# EAGLE board WAGband_2_plus_chains (EAGLE 7.5.0)
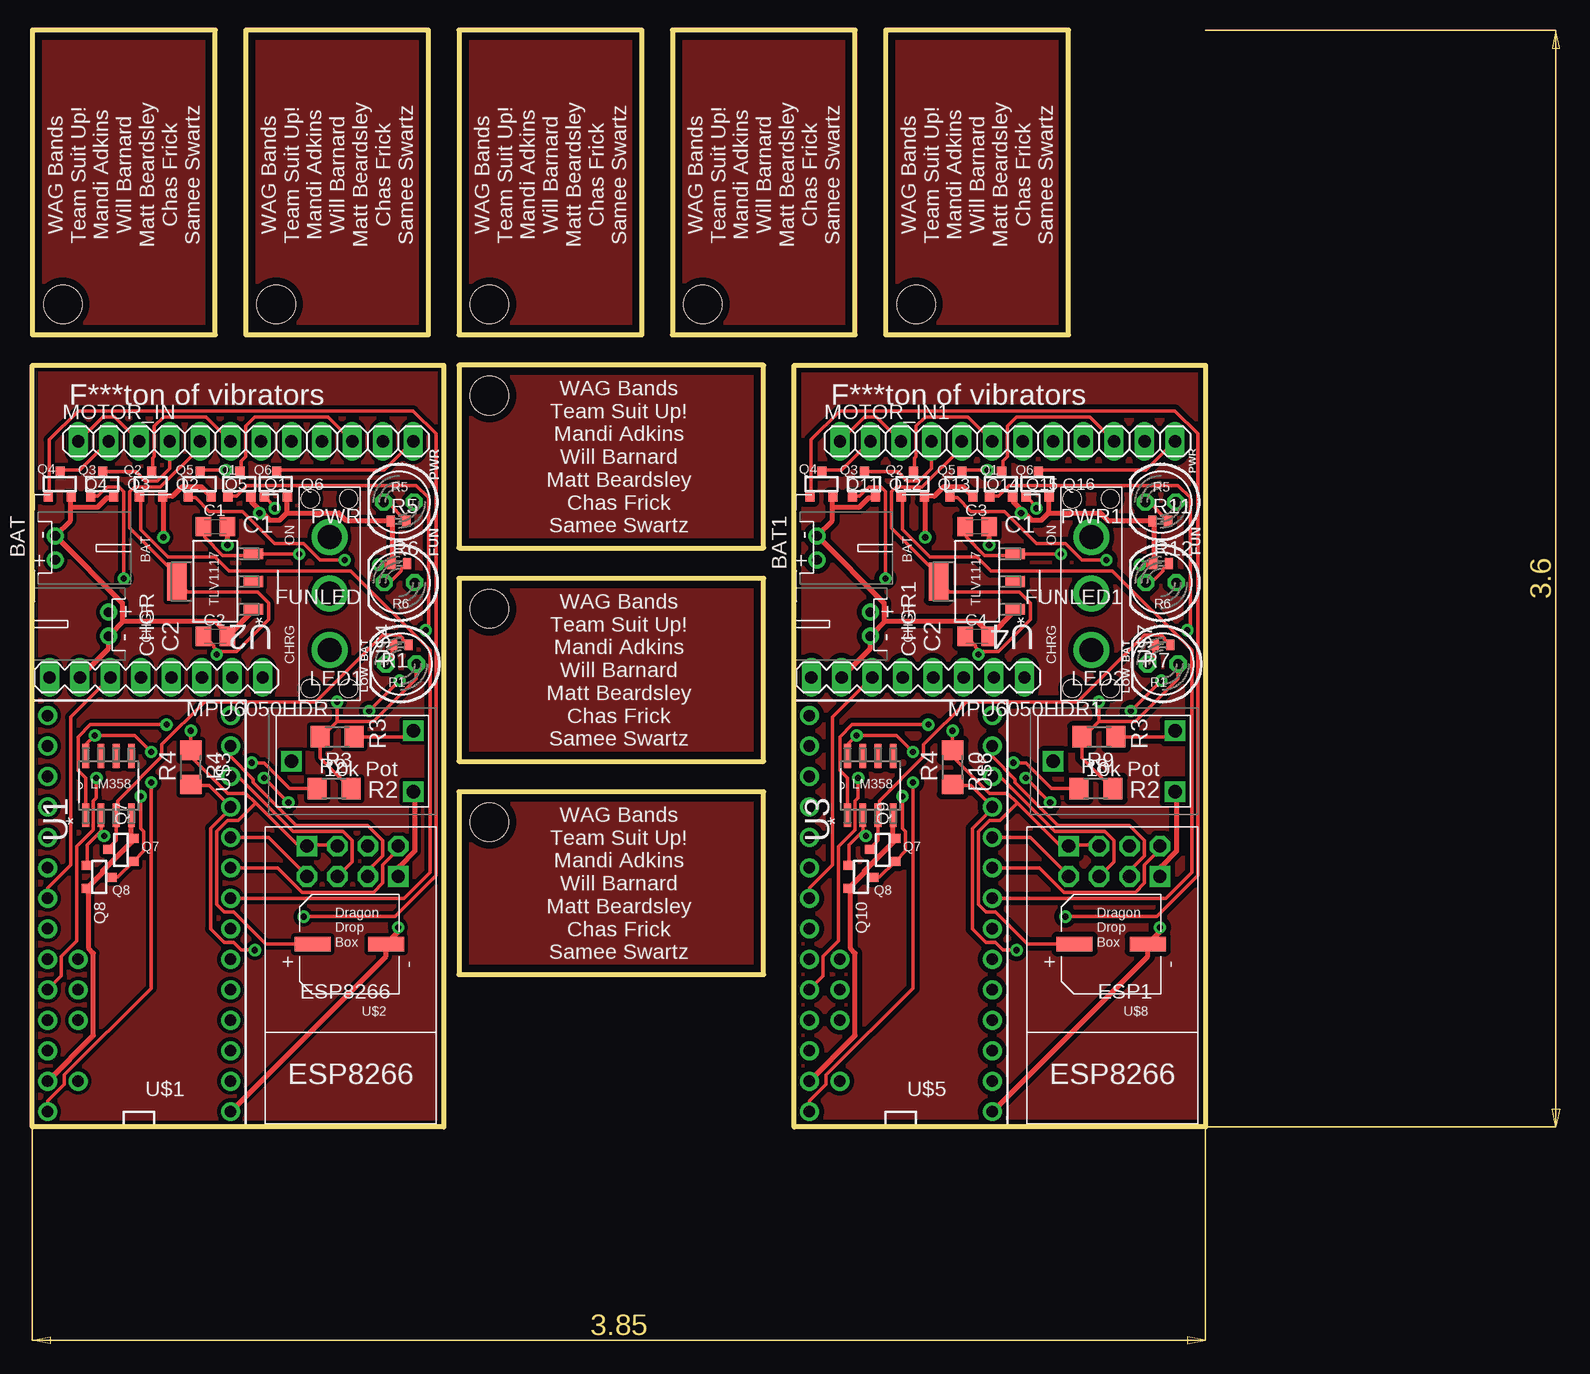
[diagram p0: board, top side]
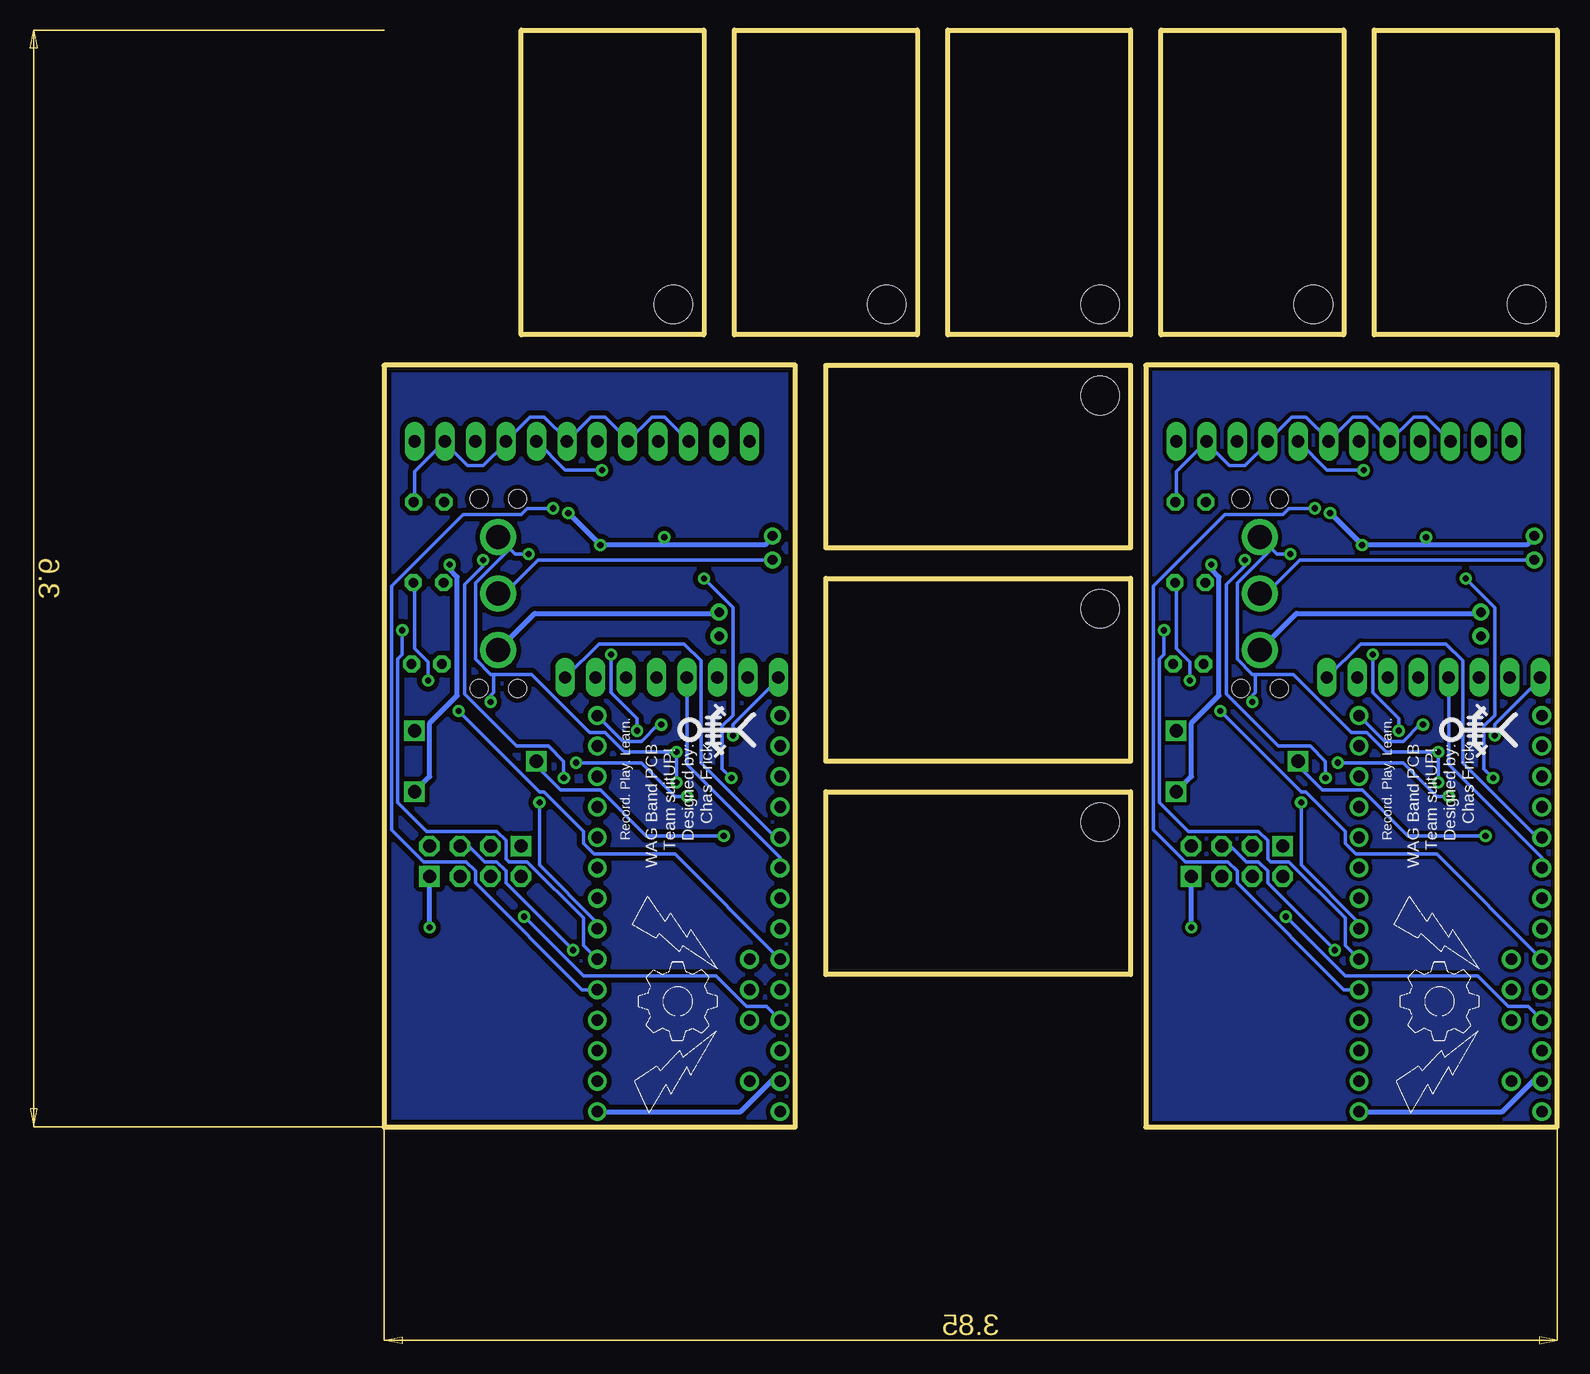
[diagram p1: board, bottom side, seen from below]

Size 97.79 x 91.44 mm. Coordinates in mm from the lower left corner, seen from the top.
Outline: 0,0 0,63.5 34.29,63.5 34.29,0 0,0
Outline: 63.5,0 63.5,63.5 97.79,63.5 97.79,0 63.5,0
Outline: 0,66.04 15.24,66.04 15.24,91.44 0,91.44 0,66.04
Outline: 17.78,66.04 33.02,66.04 33.02,91.44 17.78,91.44 17.78,66.04
Outline: 35.56,66.04 50.8,66.04 50.8,91.44 35.56,91.44 35.56,66.04
Outline: 53.34,66.04 68.58,66.04 68.58,91.44 53.34,91.44 53.34,66.04
Outline: 71.12,66.04 86.36,66.04 86.36,91.44 71.12,91.44 71.12,66.04
Outline: 35.56,63.5 35.56,48.26 60.96,48.26 60.96,63.5 35.56,63.5
Outline: 35.56,45.72 35.56,30.48 60.96,30.48 60.96,45.72 35.56,45.72
Outline: 35.56,27.94 35.56,12.7 60.96,12.7 60.96,27.94 35.56,27.94
Copper layers (1*16): Top 0.035mm / dielectric 1.5mm / Bottom 0.035mm
Design rules "SparkFun": minimum track width 8mil, minimum drill 20mil, track to track 8mil, track to pad 8mil, pad to pad 8mil, via to via 8mil, smd to smd 8mil, copper to edge 8mil, drill to drill 8mil, minimum pad ring 12mil, minimum via ring 10mil, stop-mask expansion 4mil, vias tented up to drill 20mil, thermal gap 10mil
Net classes: 0 default: width 0.305 mm; 1 GND: width 0.406 mm; 2 VCC: width 0.406 mm
Holes 3.2 mm at 2.54,68.58 20.32,68.58 38.1,68.58 55.88,68.58 73.66,68.58 38.1,60.96 38.1,43.18 38.1,25.4

## Footprints (pad centres in the part's own frame; a part is rotated, then mirrored left to right if it is on the bottom)
JST-PH-2-THM-RA = drill 0.8 pad 1.422: 1 1,0; 2 -1,0
C0805K = smd 1.3 x 1.6: 1 -1,0; 2 1,0
ESP01 = drill 1.1 octagon: CH_PD -1.285,-8.178; GPIO0 1.255,-5.638; GPIO2 -1.285,-5.638; RST 1.255,-8.178; RX 3.795,-5.638; TX -3.825,-8.178 | drill 1.1 square: GND -3.825,-5.638; VCC 3.795,-8.178
LED5MM = drill 0.813 octagon: A -1.27,0; K 1.27,0
1X12 = drill 1.016 long: 1 -13.97,0; 2 -11.43,0; 3 -8.89,0; 4 -6.35,0; 5 -3.81,0; 6 -1.27,0; 7 1.27,0; 8 3.81,0; 9 6.35,0; 10 8.89,0; 11 11.43,0; 12 13.97,0
MPU6050 = drill 1.016 long: ADD 6.35,0; GND -6.35,0; INT 8.89,0; SCL -3.81,0; SDA -1.27,0; VCC -8.89,0; XCL 3.81,0; XDA 1.27,0
SOT-23 = smd 0.762 x 0.762: 1 -0.979,-1.101; 2 0.94,-1.101; 3 0.025,1.067
R0402 = smd 0.7 x 0.9: 1 -0.65,0; 2 0.65,0
R1206 = smd 1.6 x 1.803: 1 -1.422,0; 2 1.422,0
SOIC127P600X175-8N = smd 1.981 x 0.559: 1 -2.464,1.905; 2 -2.464,0.635; 3 -2.464,-0.635; 4 -2.464,-1.905; 5 2.464,-1.905; 6 2.464,-0.635; 7 2.464,0.635; 8 2.464,1.905
SOT230P700X180-4N = smd 1.626 x 0.889: 1 -3.2,2.311; 2 -3.2,0; 3 -3.2,-2.311 | smd 1.626 x 3.175: 4 3.2,0
TEENSY3-DIL+4 = drill 0.965: 0 -7.62,13.97; 1 -7.62,11.43; 2 -7.62,8.89; 3 -7.62,6.35; 3.3V 7.62,11.43; 4 -7.62,3.81; 5 -7.62,1.27; 6 -7.62,-1.27; 7 -7.62,-3.81; 8 -7.62,-6.35; 9 -7.62,-8.89; 10 -7.62,-11.43; 11 -7.62,-13.97; 12 -7.62,-16.51; 13 7.62,-16.51; 14/A0 7.62,-13.97; 15/A1 7.62,-11.43; 16/A2 7.62,-8.89; 17/A3 7.62,-6.35; 18/A4 7.62,-3.81; 19/A5 7.62,-1.27; 20/A6 7.62,1.27; 21/A7 7.62,3.81; 22/A8 7.62,6.35; 23/A9 7.62,8.89; A10 5.08,6.35; A11 5.08,3.81; AGND 7.62,13.97; AREF 5.08,8.89; GND -7.62,16.51; VIN 7.62,16.51; VUSB 5.08,13.97
TZV1000M = smd 1.2 x 3: + 0,3.05; - 0,-3.05
CB10 = drill 1.1 square: P$1 -2.54,-5.08; P$2 2.54,-5.08; P$3 0,5.08
SPDT = drill 2: P$1 0,-4.699; P$2 0,0; P$3 0,4.699 | hole 1.5: 1.6,7.899; -1.6,-7.899; 1.6,-7.899; -1.6,7.899

## Placement (x,y rotation side)
BAT  [JST-PH-2-THM-RA]  1.91,48.26 270 top
BAT1  [JST-PH-2-THM-RA]  65.41,48.26 270 top
C1  105  [C0805K]  15.24,50.04 0 top
C2  105  [C0805K]  15.24,40.89 0 top
C3  105  [C0805K]  78.74,50.04 0 top
C4  105  [C0805K]  78.74,40.89 0 top
CHGR  [JST-PH-2-THM-RA]  6.35,41.91 90 top
CHGR1  [JST-PH-2-THM-RA]  69.85,41.91 90 top
ESP1  ESP01  [ESP01]  90.17,15.24 180 top
ESP8266  ESP01  [ESP01]  26.67,15.24 180 top
FUNLED  [LED5MM]  30.58,45.36 180 top
FUNLED1  [LED5MM]  94.08,45.36 180 top
LED1  [LED5MM]  30.73,38.58 180 top
LED2  [LED5MM]  94.23,38.58 180 top
MOTOR_IN  [1X12]  17.78,57.15 0 top
MOTOR_IN1  [1X12]  81.28,57.15 0 top
MPU6050HDR  [MPU6050]  10.31,37.47 0 top
MPU6050HDR1  [MPU6050]  73.81,37.47 0 top
PWR  [LED5MM]  30.56,52.1 180 top
PWR1  [LED5MM]  94.06,52.1 180 top
Q1  [SOT-23]  17.27,53.59 0 top
Q2  [SOT-23]  9.91,53.59 0 top
Q3  [SOT-23]  5.84,53.59 0 top
Q4  [SOT-23]  2.29,53.59 0 top
Q5  [SOT-23]  13.97,53.59 0 top
Q6  [SOT-23]  20.32,53.59 0 top
Q7  [SOT-23]  7.37,23.11 90 top
Q8  [SOT-23]  5.59,20.83 270 top
Q9  [SOT-23]  70.87,23.11 90 top
Q10  [SOT-23]  69.09,20.83 270 top
Q11  [SOT-23]  65.79,53.59 0 top
Q12  [SOT-23]  69.34,53.59 0 top
Q13  [SOT-23]  73.41,53.59 0 top
Q14  [SOT-23]  77.47,53.59 0 top
Q15  [SOT-23]  80.77,53.59 0 top
Q16  [SOT-23]  83.82,53.59 0 top
R1  1k  [R0402]  30.71,40.18 180 top
R2  30k  [R1206]  25.15,28.19 0 top
R3  30k  [R1206]  25.4,32.51 180 top
R4  10k  [R1206]  13.21,29.97 270 top
R5  1k  [R0402]  30.51,50.5 0 top
R6  1k  [R0402]  30.58,46.96 0 top
R7  1k  [R0402]  94.21,40.18 180 top
R8  30k  [R1206]  88.65,28.19 0 top
R9  30k  [R1206]  88.9,32.51 180 top
R10  10k  [R1206]  76.71,29.97 270 top
R11  1k  [R0402]  94.01,50.5 0 top
R12  1k  [R0402]  94.08,46.96 0 top
U1  LM358DR  [SOIC127P600X175-8N]  6.35,28.45 90 top
U2  TLV1117-33CDCY  [SOT230P700X180-4N]  15.24,45.47 180 top
U3  LM358DR  [SOIC127P600X175-8N]  69.85,28.45 90 top
U4  TLV1117-33CDCY  [SOT230P700X180-4N]  78.74,45.47 180 top
U$1  TEENSY_3.1_DIL+4  [TEENSY3-DIL+4]  8.89,17.78 180 top
U$2  TZVCAP  [TZV1000M]  26.42,15.24 90 top
U$3  CB10LV103M  [CB10]  26.67,30.48 90 top
U$4  MS12ASW13  [SPDT]  24.77,44.45 0 top
U$5  TEENSY_3.1_DIL+4  [TEENSY3-DIL+4]  72.39,17.78 180 top
U$6  CB10LV103M  [CB10]  90.17,30.48 90 top
U$7  MS12ASW13  [SPDT]  88.27,44.45 0 top
U$8  TZVCAP  [TZV1000M]  89.92,15.24 90 top

## Library data of the parts
BAT BAT1 CHGR CHGR1 = adafruit
C1-C4 R1-R12 = resistor
ESP1 ESP8266 MPU6050HDR MPU6050HDR1 Q1-Q16 U$2-U$4 U$6-U$8 = mqp_custom_parts
FUNLED FUNLED1 LED1 LED2 PWR PWR1 = led
MOTOR_IN MOTOR_IN1 = pinhead
U1 U3 = Texas Instruments_By_element14_Batch_1; MPN: LM358DR; OC_FARNELL: 1831865; OC_NEWARK: 34K7599; PACKAGE: SOIC-8; SUPPLIER: Texas Instruments
U2 U4 = Texas Instruments_By_element14_Batch_1; MPN: TLV1117-33CDCY; OC_FARNELL: 1494942; OC_NEWARK: 67K8520; PACKAGE: SOT-223-3; SUPPLIER: TEXAS INSTRUMENTS
U$1 U$5 = Teensy_3_and_LC_Series_Boards_v1.1

## Nets
3.3V: U$1.3.3V
3.3V1: U$5.3.3V
AREF: U$1.AREF
AREF1: U$5.AREF
ESP8266_!RST: ESP8266.CH_PD R4.2 U$1.9
ESP8266_!RST1: ESP1.CH_PD R10.2 U$5.9
ESP8266_RX: ESP8266.RX U$1.8
ESP8266_RX1: ESP1.RX U$5.8
ESP8266_TX: ESP8266.TX U$1.7
ESP8266_TX1: ESP1.TX U$5.7
GND [GND]: BAT.2 C1.2 C2.2 CHGR.2 ESP8266.GND MPU6050HDR.GND Q1.2 Q2.2 Q3.2 Q4.2 Q5.2 Q6.2 Q7.2 Q8.2 R5.1 R6.1 U1.4 U2.1 U$1.AGND U$1.GND U$2.- U$3.P$1
GND1 [GND]: BAT1.2 C3.2 C4.2 CHGR1.2 ESP1.GND MPU6050HDR1.GND Q9.2 Q10.2 Q11.2 Q12.2 Q13.2 Q14.2 Q15.2 Q16.2 R11.1 R12.1 U3.4 U4.1 U$5.AGND U$5.GND U$6.P$1 U$8.-
GPIO0: ESP8266.GPIO0 U$1.10
GPIO1: ESP1.GPIO2 U$5.11
GPIO2: ESP8266.GPIO2 U$1.11
GPIO3: ESP1.GPIO0 U$5.10
LED_REF: Q7.3 R1.1 U1.3
LED_REF1: Q9.3 R7.1 U3.3
LOW_BATT_DIO: U1.1 U$1.12
LOW_BATT_DIO1: U3.1 U$5.12
M1: Q1.1 U$1.4
M2: Q2.1 U$1.6
M3: Q3.1 U$1.22/A8
M4: Q4.1 U$1.23/A9
M5: Q5.1 U$1.5
M6: Q6.1 U$1.3
M7: Q13.1 U$5.6
M8: Q14.1 U$5.5
M9: Q15.1 U$5.4
M10: Q16.1 U$5.3
M11: Q12.1 U$5.22/A8
M12: Q11.1 U$5.23/A9
N$1: MPU6050HDR.INT U$1.17/A3
N$2: MPU6050HDR.SDA U$1.18/A4
N$3: FUNLED.A U$1.21/A7
N$4: FUNLED.K R6.2
N$7: MOTOR_IN1.12 Q16.3
N$8: MOTOR_IN1.10 Q15.3
N$9: MOTOR_IN.12 Q6.3
N$10: MOTOR_IN.10 Q1.3
N$11: MOTOR_IN.8 Q5.3
N$12: MOTOR_IN1.8 Q14.3
N$13: MOTOR_IN.6 Q2.3
N$14: MOTOR_IN.2 Q4.3
N$15: MOTOR_IN.4 Q3.3
N$16: MOTOR_IN1.6 Q13.3
N$17: MPU6050HDR.SCL U$1.19/A5
N$18: MOTOR_IN1.2 Q11.3
N$19: MOTOR_IN1.4 Q12.3
N$20: MPU6050HDR1.SCL U$5.19/A5
N$21: PWR.K R5.2
N$22: LED1.K R1.2
N$23: Q7.1 Q8.3 R2.1
N$24: PWR1.K R11.2
N$25: LED2.K R7.2
N$26: Q9.1 Q10.3 R8.1
N$27: R3.1 U$3.P$2
N$28: BAT.1 U$4.P$2
N$29 [VCC]: CHGR.1 U$4.P$1
N$30: R9.1 U$6.P$2
N$31: BAT1.1 U$7.P$2
N$32 [VCC]: CHGR1.1 U$7.P$1
N$33: MPU6050HDR1.INT U$5.17/A3
N$34: MPU6050HDR1.SDA U$5.18/A4
N$35: FUNLED1.K R12.2
N$36: FUNLED1.A U$5.21/A7
POT_REF: Q8.1 U1.2 U$3.P$3
POT_REF1: Q10.1 U3.2 U$6.P$3
VCC: C2.1 ESP8266.RST ESP8266.VCC MOTOR_IN.1 MOTOR_IN.3 MOTOR_IN.5 MOTOR_IN.7 MOTOR_IN.9 MOTOR_IN.11 PWR.A R4.1 U2.4 U$2.+
VCC1: C4.1 ESP1.RST ESP1.VCC MOTOR_IN1.1 MOTOR_IN1.3 MOTOR_IN1.5 MOTOR_IN1.7 MOTOR_IN1.9 MOTOR_IN1.11 PWR1.A R10.1 U4.4 U$8.+
VDD: C1.1 LED1.A MPU6050HDR.VCC R2.2 R3.2 U1.8 U2.3 U$1.VIN U$4.P$3
VDD1: C3.1 LED2.A MPU6050HDR1.VCC R8.2 R9.2 U3.8 U4.3 U$5.VIN U$7.P$3
VUSB: U$1.VUSB
VUSB1: U$5.VUSB

## Tracks (layer width: path | path; a pad name or v marks a point on that pad's centre or on a via)
ESP8266_!RST  (via drill 0.51)
  Top 0.305: R4.2 13.21,28.45 14.73,28.45 U$1.9 16.51,26.54 14.86,24.89 14.86,16.51 16,15.37 16.76,15.37 17.4,14.73 v18.54,14.73
  Bottom 0.305: v18.54,14.73 24.13,20.32 24.13,21.34 24.89,22.1 25.91,22.1 27.18,23.37 27.94,23.37 ESP8266.CH_PD
ESP8266_!RST1  (via drill 0.51)
  Top 0.305: R10.2 76.71,28.45 78.23,28.45 U$5.9 80.01,26.54 78.36,24.89 78.36,16.51 79.5,15.37 80.26,15.37 80.9,14.73 v82.04,14.73
  Bottom 0.305: v82.04,14.73 87.63,20.32 87.63,21.34 88.39,22.1 89.41,22.1 90.68,23.37 91.44,23.37 ESP1.CH_PD
ESP8266_RX
  Top 0.305: U$1.8 19.68,24.13 22.86,20.95 ESP8266.RX
ESP8266_RX1
  Top 0.305: U$5.8 83.19,24.13 86.36,20.95 ESP1.RX
ESP8266_TX
  Top 0.305: U$1.7 20.45,21.59 22.48,19.56 28.45,19.56 29.21,20.32 29.21,21.84 30.48,23.11 30.48,23.37 ESP8266.TX
ESP8266_TX1
  Top 0.305: U$5.7 83.95,21.59 85.98,19.56 91.95,19.56 92.71,20.32 92.71,21.84 93.98,23.11 93.98,23.37 ESP1.TX
GND  (via drill 0.51)
  Top 0.406: U2.1 18.41,43.05 16.26,40.89 C2.2 16.26,41.15 15.24,42.16 7.62,42.16 | MPU6050HDR.GND 3.94,37.47 6.35,39.88 CHGR.2 6.48,41.02 7.62,42.16 | 19.05,51.31 19.81,50.55 20.57,50.55 21.21,51.18 | 19.05,51.31 18.29,52.07 18.29,52.45 Q1.2 | 21.21,51.18 21.21,52.45 Q6.2 | 21.21,51.18 25.53,51.18 26.16,50.55 29.72,50.55 R5.1 29.97,50.42 29.97,46.99 R6.1 29.84,46.86 v28.83,46.86 | Q5.2 14.86,52.58 14.1,53.34 12.45,53.34 11.68,52.58 10.92,52.58 Q2.2 10.92,52.32 v10.92,49.15 | 3.17,51.69 3.17,50.55 1.91,49.28 BAT.2 2.03,49.15 7.49,43.69 7.49,42.29 7.62,42.16 | 3.17,51.69 3.17,52.45 Q4.2 | 3.17,51.69 5.46,51.69 6.22,52.45 6.73,52.45 Q3.2 | v16.26,48.51 16.26,50.04 C1.2 | v18.92,51.18 19.05,51.31 | U$3.P$1 31.88,27.81 31.88,22.99 30.61,21.72 30.61,20.95 ESP8266.GND | U1.4 8.26,24 Q7.2 8.51,24 5.84,21.34 5.84,21.21 4.57,19.94 Q8.2 4.7,19.81 4.7,14.86 5.08,14.48 5.08,7.62 U$1.AGND | U$1.GND 29.46,14.22 U$2.- 29.59,15.37 30.48,16.26 v30.48,16.64
  Bottom 0.406: 10.92,48.51 2.54,48.51 1.91,49.15 BAT.2 | 10.92,48.51 v16.26,48.51 v18.92,51.18 | 10.92,48.51 v10.92,49.15 | U$1.AGND 2.03,3.81 4.57,1.27 U$1.GND | v30.48,16.64 30.48,20.83 ESP8266.GND | v28.83,46.86 28.83,46.48 28.19,45.85 28.19,35.94 30.48,33.66 30.48,29.21 U$3.P$1
GND1  (via drill 0.51)
  Top 0.406: U4.1 81.92,43.05 79.76,40.89 C4.2 79.76,41.15 78.74,42.16 71.12,42.16 | MPU6050HDR1.GND 67.44,37.47 69.85,39.88 CHGR1.2 69.98,41.02 71.12,42.16 | 82.55,51.31 83.31,50.55 84.07,50.55 84.71,51.18 | 82.55,51.31 81.79,52.07 81.79,52.45 Q15.2 | 84.71,51.18 84.71,52.45 Q16.2 | 84.71,51.18 89.03,51.18 89.66,50.55 93.22,50.55 R11.1 93.47,50.42 93.47,46.99 R12.1 93.34,46.86 v92.33,46.86 | Q14.2 78.36,52.58 77.6,53.34 75.95,53.34 75.18,52.58 74.42,52.58 Q13.2 74.42,52.32 v74.42,49.15 | 66.67,51.69 66.67,50.55 65.41,49.28 BAT1.2 65.53,49.15 70.99,43.69 70.99,42.29 71.12,42.16 | 66.67,51.69 66.67,52.45 Q11.2 | 66.67,51.69 68.96,51.69 69.72,52.45 70.23,52.45 Q12.2 | v79.76,48.51 79.76,50.04 C3.2 | v82.42,51.18 82.55,51.31 | U$6.P$1 95.38,27.81 95.38,22.99 94.11,21.72 94.11,20.95 ESP1.GND | U3.4 71.75,24 Q9.2 72.01,24 69.34,21.34 69.34,21.21 68.07,19.94 Q10.2 68.2,19.81 68.2,14.86 68.58,14.48 68.58,7.62 U$5.AGND | U$5.GND 92.96,14.22 U$8.- 93.09,15.37 93.98,16.26 v93.98,16.64
  Bottom 0.406: 74.42,48.51 66.04,48.51 65.41,49.15 BAT1.2 | 74.42,48.51 v79.76,48.51 v82.42,51.18 | 74.42,48.51 v74.42,49.15 | U$5.AGND 65.53,3.81 68.07,1.27 U$5.GND | v93.98,16.64 93.98,20.83 ESP1.GND | v92.33,46.86 92.33,46.48 91.69,45.85 91.69,35.94 93.98,33.66 93.98,29.21 U$6.P$1
GPIO0
  Top 0.305: U$1.10 17.14,29.21 21.72,24.64 25.91,24.64 26.67,23.88 26.67,22.1 25.53,20.95 ESP8266.GPIO0
GPIO1
  Top 0.305: U$5.11 80.01,30.86 81.92,28.96 81.92,28.7 85.47,25.15 91.44,25.15 92.71,23.88 92.71,22.61 91.57,21.46 91.57,20.95 ESP1.GPIO2
GPIO2
  Top 0.305: U$1.11 16.51,30.86 18.41,28.96 18.41,28.7 21.97,25.15 27.94,25.15 29.21,23.88 29.21,22.61 28.07,21.46 28.07,20.95 ESP8266.GPIO2
GPIO3
  Top 0.305: U$5.10 80.64,29.21 85.22,24.64 89.41,24.64 90.17,23.88 90.17,22.1 89.03,20.95 ESP1.GPIO0
LED_REF
  Top 0.305: Q7.3 6.35,23.24 6.99,23.88 U1.3 7.11,26.04 7.11,27.18 10.79,30.86 10.79,31.88 14.35,35.43 23.62,35.43 29.21,41.02 30.61,41.02 30.86,40.77 30.86,40.64 31.24,40.26 R1.1
LED_REF1
  Top 0.305: Q9.3 69.85,23.24 70.48,23.88 U3.3 70.61,26.04 70.61,27.18 74.3,30.86 74.3,31.88 77.85,35.43 87.12,35.43 92.71,41.02 94.11,41.02 94.36,40.77 94.36,40.64 94.74,40.26 R7.1
LOW_BATT_DIO  (via drill 0.51)
  Top 0.305: U1.1 4.45,29.08 3.81,29.72 3.81,32.51 4.83,33.53 v11.18,33.53
  Bottom 0.305: v11.18,33.53 11.43,33.53 12.83,32.13 14.35,32.13 U$1.12
LOW_BATT_DIO1  (via drill 0.51)
  Top 0.305: U3.1 67.94,29.08 67.31,29.72 67.31,32.51 68.33,33.53 v74.68,33.53
  Bottom 0.305: v74.68,33.53 74.93,33.53 76.33,32.13 77.85,32.13 U$5.12
M1  (via drill 0.51)
  Top 0.305: v32.77,41.4 33.02,41.66 33.02,52.45 32,53.47 17.91,53.47 17.02,52.58 16.38,52.58 Q1.1
  Bottom 0.305: v32.77,41.4 32.77,39.37 33.15,38.99 33.15,27.05 30.73,24.64 24.89,24.64 24.13,23.88 24.13,22.35 23.88,22.1 22.35,22.1 17.65,17.4 17.65,15.11 U$1.4
M2
  Top 0.305: U$1.6 30.99,19.05 33.15,21.21 33.15,39.75 26.54,46.35 16.38,46.35 15.24,47.5 11.3,47.5 9.02,49.78 9.02,52.45 Q2.1
M3  (via drill 0.51)
  Top 0.305: v7.62,45.72 7.62,52.96 7.24,53.34 6.22,53.34 5.46,52.58 4.95,52.58 Q3.1 | v5.33,29.08 5.33,27.43 5.08,27.18 5.08,24.77 3.68,23.37 3.68,15.49 2.41,14.22 2.41,12.57 U$1.22/A8
  Bottom 0.305: v7.62,45.72 5.21,43.31 5.21,34.29 6.1,33.4 6.1,29.84 v5.33,29.08
M4  (via drill 0.51)
  Top 0.305: v22.61,17.53 30.23,17.53 33.66,20.95 33.66,57.78 31.75,59.69 3.81,59.69 1.4,57.28 1.4,52.58 Q4.1
  Bottom 0.305: v22.61,17.53 17.65,12.57 6.6,12.57 4.06,10.03 2.41,10.03 U$1.23/A9
M5  (via drill 0.51)
  Top 0.305: v26.04,47.24 24,47.24 22.61,48.64 20.19,48.64 17.53,51.31 14.73,51.31 13.59,52.45 13.08,52.45 Q5.1 | v21.34,27.05 v19.3,29.08
  Bottom 0.305: v26.04,47.24 26.04,46.74 27.56,45.21 27.56,36.07 23.24,31.75 20.57,31.75 19.3,30.48 v19.3,29.08 | v21.34,27.05 21.34,21.84 16.51,17.02 U$1.5
M6  (via drill 0.51)
  Top 0.305: v20.19,51.56 20.19,51.69 19.43,52.45 Q6.1
  Bottom 0.305: v20.19,51.56 22.35,51.56 22.86,51.05 27.69,51.05 33.66,45.09 33.66,24.77 30.99,22.1 27.43,22.1 26.67,21.34 26.67,20.32 17.78,11.43 U$1.3
M7
  Top 0.305: U$5.6 94.49,19.05 96.65,21.21 96.65,39.75 90.04,46.35 79.88,46.35 78.74,47.5 74.8,47.5 72.52,49.78 72.52,52.45 Q13.1
M8  (via drill 0.51)
  Top 0.305: v89.53,47.24 87.5,47.24 86.11,48.64 83.69,48.64 81.03,51.31 78.23,51.31 77.09,52.45 76.58,52.45 Q14.1 | v84.84,27.05 v82.8,29.08
  Bottom 0.305: v89.53,47.24 89.53,46.74 91.06,45.21 91.06,36.07 86.74,31.75 84.07,31.75 82.8,30.48 v82.8,29.08 | v84.84,27.05 84.84,21.84 80.01,17.02 U$5.5
M9  (via drill 0.51)
  Top 0.305: v96.27,41.4 96.52,41.66 96.52,52.45 95.5,53.47 81.41,53.47 80.52,52.58 79.88,52.58 Q15.1
  Bottom 0.305: v96.27,41.4 96.27,39.37 96.65,38.99 96.65,27.05 94.23,24.64 88.39,24.64 87.63,23.88 87.63,22.35 87.38,22.1 85.85,22.1 81.15,17.4 81.15,15.11 U$5.4
M10  (via drill 0.51)
  Top 0.305: v83.69,51.56 83.69,51.69 82.93,52.45 Q16.1
  Bottom 0.305: v83.69,51.56 85.85,51.56 86.36,51.05 91.19,51.05 97.16,45.09 97.16,24.77 94.49,22.1 90.93,22.1 90.17,21.34 90.17,20.32 81.28,11.43 U$5.3
M11  (via drill 0.51)
  Top 0.305: v71.12,45.72 71.12,52.96 70.74,53.34 69.72,53.34 68.96,52.58 68.45,52.58 Q12.1 | v68.83,29.08 68.83,27.43 68.58,27.18 68.58,24.77 67.18,23.37 67.18,15.49 65.91,14.22 65.91,12.57 U$5.22/A8
  Bottom 0.305: v71.12,45.72 68.71,43.31 68.71,34.29 69.6,33.4 69.6,29.84 v68.83,29.08
M12  (via drill 0.51)
  Top 0.305: v86.11,17.53 93.73,17.53 97.16,20.95 97.16,57.78 95.25,59.69 67.31,59.69 64.9,57.28 64.9,52.58 Q11.1
  Bottom 0.305: v86.11,17.53 81.15,12.57 70.1,12.57 67.56,10.03 65.91,10.03 U$5.23/A9
N$1
  Bottom 0.305: U$1.17/A3 1.65,24.13 7.87,30.35 7.87,38.86 9.27,40.26 16.38,40.26 19.18,37.47 MPU6050HDR.INT
N$2
  Bottom 0.305: U$1.18/A4 1.27,22.48 9.02,30.23 9.02,37.47 MPU6050HDR.SDA
N$3  (via drill 0.51)
  Top 0.305: v28.07,34.67 v30.61,37.21
  Bottom 0.305: v30.61,37.21 30.61,38.73 31.75,39.88 31.75,45.34 FUNLED.A | v28.07,34.67 21.34,27.94 20.95,27.94 17.65,24.64 17.65,23.62 16.76,22.73 10.03,22.73 U$1.21/A7
N$4
  Top 0.305: R6.2 31.11,46.86 30.73,46.48 30.73,46.35 29.84,45.47 29.34,45.47 FUNLED.K
N$5
  pour Bottom (isolate 0.305): 0,0 34.29,0 34.29,63.5 0,63.5
N$6
  pour Top (isolate 0.305): 0,0 34.29,0 34.29,63.5 0,63.5
N$7
  Top 0.305: MOTOR_IN1.12 92.84,54.74 83.95,54.74 Q16.3
N$8
  Top 0.305: MOTOR_IN1.10 88.14,59.18 82.04,59.18 81.28,58.42 81.28,55.88 80.9,55.5 80.9,54.74 Q15.3
N$9
  Top 0.305: MOTOR_IN.12 29.34,54.74 20.45,54.74 Q6.3
N$10
  Top 0.305: MOTOR_IN.10 24.64,59.18 18.54,59.18 17.78,58.42 17.78,55.88 17.4,55.5 17.4,54.74 Q1.3
N$11  (via drill 0.51)
  Top 0.305: v16.13,54.74 14.1,54.74 Q5.3
  Bottom 0.305: v16.13,54.74 19.18,54.74 MOTOR_IN.8
N$12  (via drill 0.51)
  Top 0.305: v79.63,54.74 77.6,54.74 Q14.3
  Bottom 0.305: v79.63,54.74 82.68,54.74 MOTOR_IN1.8
N$13
  Top 0.305: MOTOR_IN.6 14.48,59.18 10.92,59.18 10.16,58.42 10.16,55.88 10.03,55.75 10.03,54.74 Q2.3
N$14
  Top 0.305: MOTOR_IN.2 3.94,54.74 2.41,54.74 Q4.3
N$15
  Top 0.305: MOTOR_IN.4 11.43,54.86 10.41,53.85 9.4,53.85 8.64,54.61 5.97,54.61 Q3.3
N$16
  Top 0.305: MOTOR_IN1.6 77.98,59.18 74.42,59.18 73.66,58.42 73.66,55.88 73.53,55.75 73.53,54.74 Q13.3
N$17
  Top 0.305: U$1.19/A5 1.27,19.94 3.17,21.84 3.17,34.16 6.48,37.47 MPU6050HDR.SCL
N$18
  Top 0.305: MOTOR_IN1.2 67.44,54.74 65.91,54.74 Q11.3
N$19
  Top 0.305: MOTOR_IN1.4 74.93,54.86 73.91,53.85 72.9,53.85 72.14,54.61 69.47,54.61 Q12.3
N$20
  Top 0.305: U$5.19/A5 64.77,19.94 66.67,21.84 66.67,34.16 69.98,37.47 MPU6050HDR1.SCL
N$21
  Top 0.305: R5.2 31.11,50.55 29.59,52.07 29.34,52.07 PWR.K
N$22
  Top 0.305: R1.2 29.97,40.13 29.97,39.12 29.46,38.61 LED1.K
N$23  (via drill 0.51)
  Top 0.305: Q8.3 6.73,20.83 7.11,20.83 8.38,22.1 Q7.1 8.51,22.23 9.27,22.99 9.27,24.64 9.02,24.89 v9.02,27.56 | R2.1 21.46,28.19 19.3,30.35 v18.29,30.35
  Bottom 0.305: v18.29,30.35 12.83,30.35 10.03,27.56 v9.02,27.56
N$24
  Top 0.305: R11.2 94.61,50.55 93.09,52.07 92.84,52.07 PWR1.K
N$25
  Top 0.305: R7.2 93.47,40.13 93.47,39.12 92.96,38.61 LED2.K
N$26  (via drill 0.51)
  Top 0.305: Q10.3 70.23,20.83 70.61,20.83 71.88,22.1 Q9.1 72.01,22.23 72.77,22.99 72.77,24.64 72.52,24.89 v72.52,27.56 | R8.1 84.96,28.19 82.8,30.35 v81.79,30.35
  Bottom 0.305: v81.79,30.35 76.33,30.35 73.53,27.56 v72.52,27.56
N$27
  Top 0.305: R3.1 31.24,32.51 U$3.P$2
N$28
  Bottom 0.305: U$4.P$2 24.26,44.45 21.46,47.24 1.91,47.24 BAT.1
N$29
  Bottom 0.406: U$4.P$1 21.72,42.8 6.35,42.8 CHGR.1
N$30
  Top 0.305: R9.1 94.74,32.51 U$6.P$2
N$31
  Bottom 0.305: U$7.P$2 87.76,44.45 84.96,47.24 65.41,47.24 BAT1.1
N$32
  Bottom 0.406: U$7.P$1 85.22,42.8 69.85,42.8 CHGR1.1
N$33
  Bottom 0.305: U$5.17/A3 65.15,24.13 71.37,30.35 71.37,38.86 72.77,40.26 79.88,40.26 82.68,37.47 MPU6050HDR1.INT
N$34
  Bottom 0.305: U$5.18/A4 64.77,22.48 72.52,30.23 72.52,37.47 MPU6050HDR1.SDA
N$35
  Top 0.305: R12.2 94.61,46.86 94.23,46.48 94.23,46.35 93.34,45.47 92.84,45.47 FUNLED1.K
N$36  (via drill 0.51)
  Top 0.305: v91.57,34.67 v94.11,37.21
  Bottom 0.305: v94.11,37.21 94.11,38.73 95.25,39.88 95.25,45.34 FUNLED1.A | v91.57,34.67 84.84,27.94 84.45,27.94 81.15,24.64 81.15,23.62 80.26,22.73 73.53,22.73 U$5.21/A7
N$37
  pour Bottom (isolate 0.406): 63.5,0 97.79,0 97.79,63.5 63.5,63.5
N$38
  pour Top (isolate 0.406): 63.5,0 97.79,0 97.79,63.5 63.5,63.5
POT_REF  (via drill 0.51)
  Top 0.305: 5.65,24.57 5.71,24.64 U1.2 | 5.65,24.57 4.57,23.5 4.57,21.84 Q8.1 | v5.97,24.26 5.65,24.57
  Bottom 0.305: v5.97,24.26 12.45,24.26 16.26,28.07 19.56,28.07 21.59,30.1 U$3.P$3
POT_REF1  (via drill 0.51)
  Top 0.305: 69.15,24.57 69.22,24.64 U3.2 | 69.15,24.57 68.07,23.5 68.07,21.84 Q10.1 | v69.47,24.26 69.15,24.57
  Bottom 0.305: v69.47,24.26 75.95,24.26 79.76,28.07 83.06,28.07 85.09,30.1 U$6.P$3
S$1
  pour Top (isolate 0.61): 17.78,66.04 33.02,66.04 33.02,91.44 17.78,91.44
S$2
  pour Top (isolate 0.61): 35.56,66.04 50.8,66.04 50.8,91.44 35.56,91.44
S$3
  pour Top (isolate 0.61): 53.34,66.04 68.58,66.04 68.58,91.44 53.34,91.44
S$4
  pour Top (isolate 0.61): 0,66.04 15.24,66.04 15.24,91.44 0,91.44
S$5
  pour Top (isolate 0.61): 71.12,66.04 86.36,66.04 86.36,91.44 71.12,91.44
S$6
  pour Top (isolate 0.61): 35.56,63.5 35.56,48.26 60.96,48.26 60.96,63.5
S$7
  pour Top (isolate 0.61): 35.56,45.72 35.56,30.48 60.96,30.48 60.96,45.72
S$8
  pour Top (isolate 0.61): 35.56,27.94 35.56,12.7 60.96,12.7 60.96,27.94
VCC  (via drill 0.51)
  Top 0.305: 18.61,26.99 22.1,23.5 22.86,23.5 ESP8266.VCC 22.99,23.5 25.4,23.5 ESP8266.RST | 18.61,26.99 17.78,27.81 16.26,27.81 13.21,30.86 R4.1 v13.21,33.02 | U$2.+ 19.43,15.24 16.76,17.91 16,17.91 15.37,18.54 15.37,24.64 16.26,25.53 17.14,25.53 18.61,26.99 | 15.49,39.62 15.11,40.01 15.11,40.13 14.35,40.89 C2.1 | 15.49,39.62 17.02,39.62 19.68,42.29 19.68,43.69 18.8,44.58 12.95,44.58 12.06,45.47 U2.4 12.06,45.59 12.06,45.97 8.13,49.91 8.13,52.96 8.51,53.34 10.67,53.34 13.97,56.64 MOTOR_IN.5 | MOTOR_IN.1 5.84,59.18 6.86,59.18 MOTOR_IN.3 | v15.37,39.37 15.49,39.5 15.49,39.62
  Bottom 0.305: PWR.A 31.75,52.2 31.75,54.61 MOTOR_IN.11 29.21,57.02 27.3,55.12 26.04,55.12 24.13,57.02 MOTOR_IN.9 22.1,59.18 20.95,59.18 19.05,57.28 MOTOR_IN.7 17.02,59.18 15.88,59.18 13.97,57.28 MOTOR_IN.5 11.94,59.18 10.92,59.18 MOTOR_IN.3 | v13.21,33.02 13.21,34.04 15.37,36.2 v15.37,39.37
VCC1  (via drill 0.51)
  Top 0.305: 82.11,26.99 85.6,23.5 86.36,23.5 ESP1.VCC 86.49,23.5 88.9,23.5 ESP1.RST | 82.11,26.99 81.28,27.81 79.76,27.81 76.71,30.86 R10.1 v76.71,33.02 | U$8.+ 82.93,15.24 80.26,17.91 79.5,17.91 78.87,18.54 78.87,24.64 79.76,25.53 80.64,25.53 82.11,26.99 | 78.99,39.62 78.61,40.01 78.61,40.13 77.85,40.89 C4.1 | 78.99,39.62 80.52,39.62 83.19,42.29 83.19,43.69 82.3,44.58 76.45,44.58 75.56,45.47 U4.4 75.56,45.59 75.56,45.97 71.63,49.91 71.63,52.96 72.01,53.34 74.17,53.34 77.47,56.64 MOTOR_IN1.5 | MOTOR_IN1.1 69.34,59.18 70.36,59.18 MOTOR_IN1.3 | v78.87,39.37 78.99,39.5 78.99,39.62
  Bottom 0.305: PWR1.A 95.25,52.2 95.25,54.61 MOTOR_IN1.11 92.71,57.02 90.81,55.12 89.53,55.12 87.63,57.02 MOTOR_IN1.9 85.6,59.18 84.45,59.18 82.55,57.28 MOTOR_IN1.7 80.52,59.18 79.38,59.18 77.47,57.28 MOTOR_IN1.5 75.44,59.18 74.42,59.18 MOTOR_IN1.3 | v76.71,33.02 76.71,34.04 78.87,36.2 v78.87,39.37
VDD  (via drill 0.51)
  Top 0.305: R2.2 26.54,28.19 24,30.73 24,32.51 R3.2 24.13,32.51 25.4,33.78 | LED1.A 32,37.34 28.45,33.78 25.4,33.78 | C1.1 14.35,50.04 14.35,49.15 15.88,47.62 18.29,47.62 U2.3 18.54,47.75 v22.23,47.75 | U1.8 4.45,31.88 v5.21,32.64 8.51,32.64 v9.91,31.24 | U$1.VIN 1.27,2.16 2.67,3.56 2.67,4.32 9.91,11.56 v9.91,28.7 | v25.4,35.43 25.4,33.78
  Bottom 0.305: v22.23,47.75 23.37,47.75 U$4.P$3 23.88,48.13 26.67,45.34 26.67,38.99 25.4,37.72 25.15,37.72 | v5.21,32.64 5.21,33.53 1.52,37.21 1.52,37.47 MPU6050HDR.VCC | v9.91,28.7 v9.91,31.24 14.22,31.24 15.88,32.89 17.14,32.89 21.97,37.72 25.15,37.72 | v25.4,35.43 25.4,35.94 25.15,36.2 25.15,37.72
VDD1  (via drill 0.51)
  Top 0.305: R8.2 90.04,28.19 87.5,30.73 87.5,32.51 R9.2 87.63,32.51 88.9,33.78 | LED2.A 95.5,37.34 91.95,33.78 88.9,33.78 | C3.1 77.85,50.04 77.85,49.15 79.38,47.62 81.79,47.62 U4.3 82.04,47.75 v85.72,47.75 | U3.8 67.94,31.88 v68.71,32.64 72.01,32.64 v73.41,31.24 | U$5.VIN 64.77,2.16 66.17,3.56 66.17,4.32 73.41,11.56 v73.41,28.7 | v88.9,35.43 88.9,33.78
  Bottom 0.305: v85.72,47.75 86.87,47.75 U$7.P$3 87.38,48.13 90.17,45.34 90.17,38.99 88.9,37.72 88.65,37.72 | v68.71,32.64 68.71,33.53 65.02,37.21 65.02,37.47 MPU6050HDR1.VCC | v73.41,28.7 v73.41,31.24 77.72,31.24 79.38,32.89 80.64,32.89 85.47,37.72 88.65,37.72 | v88.9,35.43 88.9,35.94 88.65,36.2 88.65,37.72

## Text on the board
tPlace: WAG Bands / Team Suit Up! / Mandi Adkins / Will Barnard / Matt Beardsley / Chas Frick / Samee Swartz | WAG Bands / Team Suit Up! / Mandi Adkins / Will Barnard / Matt Beardsley / Chas Frick / Samee Swartz | WAG Bands / Team Suit Up! / Mandi Adkins / Will Barnard / Matt Beardsley / Chas Frick / Samee Swartz | WAG Bands / Team Suit Up! / Mandi Adkins / Will Barnard / Matt Beardsley / Chas Frick / Samee Swartz | WAG Bands / Team Suit Up! / Mandi Adkins / Will Barnard / Matt Beardsley / Chas Frick / Samee Swartz | F***ton of vibrators | F***ton of vibrators | PWR | WAG Bands / Team Suit Up! / Mandi Adkins / Will Barnard / Matt Beardsley / Chas Frick / Samee Swartz | PWR | Q4 | Q3 | Q2 | Q5 | Q1 | Q6 | R5 | Q4 | Q3 | Q2 | Q5 | Q1 | Q6 | R5 | C1 | FUN | C1 | FUN | BAT | ON | BAT | ON | TLV1117 | TLV1117 | R6 | R6 | LOW_BAT | LOW_BAT | CHGR | C2 | CHGR | C2 | CHRG | CHRG | WAG Bands / Team Suit Up! / Mandi Adkins / Will Barnard / Matt Beardsley / Chas Frick / Samee Swartz | R1 | R1 | R3 | R3 | R4 | R4 | LM358 | LM358 | R2 | R2 | Q7 | Q7 | WAG Bands / Team Suit Up! / Mandi Adkins / Will Barnard / Matt Beardsley / Chas Frick / Samee Swartz | Q8 | Q8 | Dragon / Drop / Box | Dragon / Drop / Box
bPlace: Record. Play. Learn. | Record. Play. Learn. | WAG Band PCB / Team suitUP! / Designed by: / Chas Frick | WAG Band PCB / Team suitUP! / Designed by: / Chas Frick
201bmp: C:/Users/Chas/Desktop/Untitled.bmp | C:/Users/Chas/Desktop/Untitled.bmp